# Altium PCB MTG_B_MAIN.PcbDoc (part 2 of 2)
Units mm, origin at the board's own origin, x right, y up, seen from the top; angles counter-clockwise.
Board outline 99.45 x 60.57 mm, 4 copper layers (Top Layer, Layer 1, Layer 2, Bottom Layer), stack 1.544 mm thick; 115 components, 96 nets, 460 pads, 131 vias.
Unrouted connection lines stored in the file: 2.
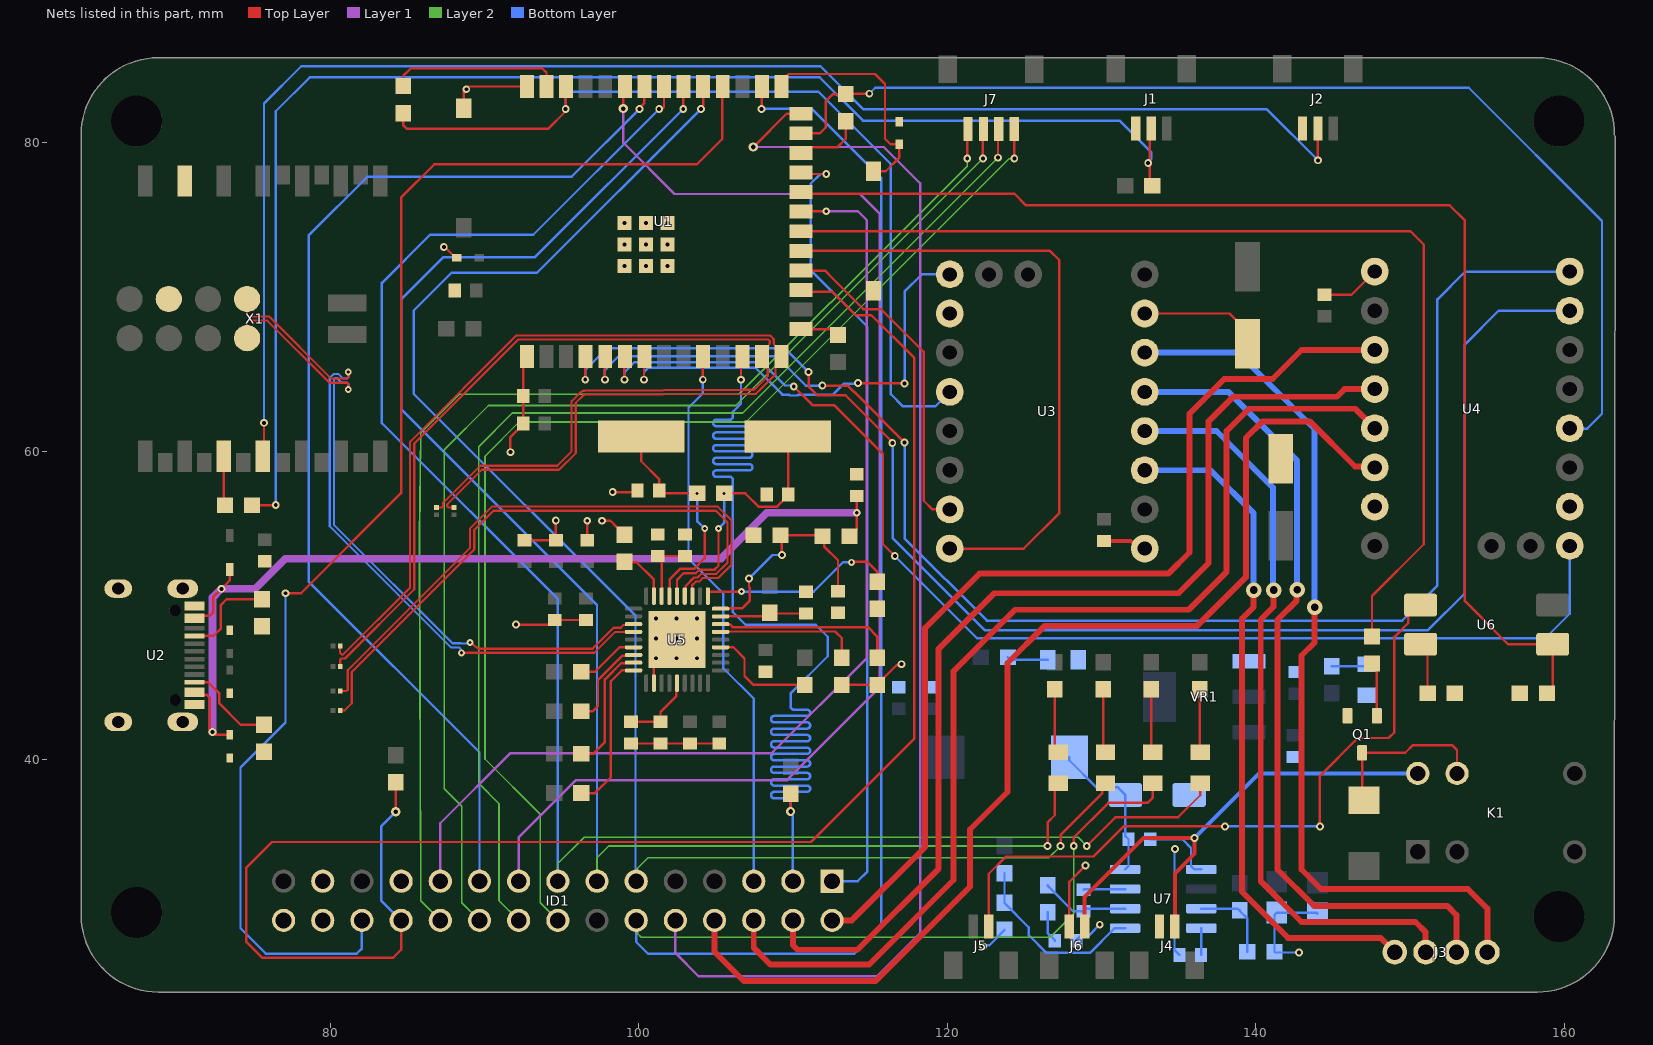
[diagram p4: the nets of this part, all layers, seen from the top]

## Via types
v1: diameter 0.508, hole 0.254, Top Layer to Bottom Layer, 103 vias
v2: diameter 0.45, hole 0.2, Top Layer to Bottom Layer, 20 vias
v3: diameter 1, hole 0.5, Top Layer to Bottom Layer, 4 vias
v4: diameter 0.6, hole 0.3, Top Layer to Bottom Layer, 4 vias

## Nets (pads, with @x,y where several pads share a name; then routed paths per layer and width w, separated by ;. In a path a pad name is that pad's centre, name@x,y a point inside that pad or via, vN(x,y) a via of type N, cw(c..) or ccw(c..) an arc to the next point about the centre after c; other vN are vias at no path point) (continued)
ESP_D_N: R37.2 R41.2 U1.13 | length 72.1
  Top Layer w0.139: R37.2@80.645,46.036 80.636,46.043 80.636,46.49 80.718,46.572 80.944,46.572 85.43,51.058 85.43,60.507 92.163,67.24 108.394,67.24 108.476,67.158 108.476,67.043 108.47,67.037 108.47,66.949 107.974,66.453 U1.13@107.974,66.153 108.354,65.773 108.354,64.876 107.606,64.127 ; R41.2@86.868,56.363 87.225,56.363 87.306,56.445 87.306,56.67 89.703,59.067 94.708,59.067 95.635,59.994 95.635,63.25 96.196,63.811 cw(c96.385,63.623) 96.199,63.814 cw(c96.482,63.523) 96.48,63.929 106.692,63.99 107.468,63.99 107.604,64.126
ESP_D_P: R36.2 R40.2 U1.14 | length 72.7
  Top Layer w0.139: R36.2@80.62,47.371 80.62,46.936 80.718,46.838 80.834,46.838 85.164,51.169 85.164,60.617 92.053,67.506 108.505,67.506 108.742,67.268 108.742,67.043 108.748,67.037 108.748,66.949 109.244,66.453 U1.14@109.244,66.153 109.244,65.853 108.864,65.473 108.864,65.008 107.794,63.938 ; R40.2@88.011,56.363 87.654,56.363 87.573,56.445 87.573,56.56 89.814,58.801 94.818,58.801 95.901,59.884 95.901,63.139 96.385,63.623 cw(c96.482,63.523) 96.481,63.663 106.693,63.724 107.579,63.724 107.787,63.932 ; 107.788,63.933 ccw(c107.606,64.127) 107.793,63.937
EXTRA: J2.2 X1.4 | length 96.8
  Top Layer w0.156: X1.4@75.627,59.69 75.692,59.755 v1(75.692,61.849) ; v1(144.018,78.867) J2.2@144.018,80.924
  Bottom Layer w0.156: v1(75.692,61.849) 75.692,82.55 78.105,84.963 111.76,84.963 114.554,82.169 140.716,82.169 v1(144.018,78.867)
EXTRA_1: ID1.17 U1.35 | length 83.2
  Top Layer w0.156: v4(98.984,82.22) 98.984,83.553 U1.35@99.084,83.653
  Layer 1 w0.156: ID1.17@92.202,32.131 92.202,34.976 95.91,38.684 109.601,38.684 115.595,44.679 115.595,75.413 114.325,76.683 102.311,76.683 98.984,80.01 v4(98.984,82.22)
EXTRA_2: ID1.10 U1.26 | length 84.1
  Top Layer w0.156: v4(107.417,79.731) 109.574,81.888 U1.26@110.494,81.888
  Layer 1 w0.156: ID1.10@102.362,29.591 102.362,27.483 103.881,25.964 115.423,25.964 118.237,28.778 118.237,77.368 115.875,79.731 v4(107.417,79.731)
GND: C1.1 C2.1 C3.1 C4.1 C5.2 C6.2 C7.2 C8.2 C9.1 C10.1 C11.1 C12.1 C13.1 C14.1 C15.1 C16.1 C17.1 C18.1 C19.1 C20.2 C21.1 C22.1 C23.2 C24.1 C25.1 C27.1 C28.1 C29.1 C30.1 C31.1 C32.1 C33.1 C34.1 C35.1 D2.2 D3.2 D4.2 D5.2 D6.2 D12.A D13.1 D14.1 ID1.23 ID1.27 ID1.28 ID1.30 J1.3 J2.3 J4.2 J6.2 Q1.2 R5.1 R6.1 R10.2 R12.2 R13.2 R14.2 R18.2 R22.1 R23.2 R30.2 R31.2 S3.1 S4.1 U1.1 U1.40 U1.41_1 U1.41_2 U1.41_3 U1.41_4 U1.41_5 U1.41_6 U1.41_7 U1.41_8 U1.41_9 U2.0 U2.1 U2.2 U2.3 U2.A1 U2.A12 U2.B1 U2.B12 U3.1 U3.7 U3.10 U4.1 U4.7 U4.10 U5.11 U5.37 U7.7 VR1.1 X1.13 X1.27 | length 78.1
  Top Layer w0.156: U2.A12@71.195,43.429 U2.B1@71.195,43.729 ; U2.B12@71.195,49.829 U2.A1@71.195,50.129 ; v1(87.351,73.254) 87.414,73.254 88.125,72.542 D5.2@88.189,72.542 ; S4.1@88.631,82.247 88.631,83.297 88.987,83.653 U1.40@92.734,83.653 ; v1(91.669,59.944) 91.669,60.92 92.496,61.747 C2.1@92.496,61.797 C3.1@92.496,63.575 92.496,65.915 U1.1@92.734,66.153 ; v1(92.024,48.768) 94.246,48.768 C18.1@94.54,49.062 C19.1@96.572,49.062 ; C15.1@92.583,54.232 94.603,54.232 94.609,54.238 v1(94.609,55.506) ; C16.1@96.647,54.232 v1(96.647,55.499) ; v1(97.612,55.499) 98.146,55.499 98.609,55.037 98.632,55.037 99.06,54.609 R18.2@99.06,54.585 ; v1(98.298,57.353) 99.803,57.353 C20.2@99.906,57.456 ; C25.1@99.493,41.061 C24.1@101.398,41.061 C9.1@103.303,41.061 C10.1@105.208,41.061 ; U5.11@100.969,44.976 100.969,46.435 v1(101.117,46.584) ; R13.2@113.157,44.856 R14.2@115.443,44.856 ; R14.2@115.443,44.879 116.696,46.132 116.963,46.132 v1(117.03,46.199) ; J6.2@127.897,29.207 127.897,32.088 v1(128.956,33.147) ; C8.2@130.148,54.186 C8.2@130.47,53.864 ; U3.7@132.791,68.936 138.279,68.936 139.446,67.769 C7.2@139.446,66.969 ; C6.2@144.451,70.147 146.194,70.147 U4.1@147.701,71.653
  Top Layer w0.254: C8.2@130.148,54.186 131.882,54.186 132.373,53.696 U3.1@132.791,53.696
  Bottom Layer w0.156: v1(122.301,27.915) 122.368,27.982 122.723,27.982 123.698,28.957 R30.2@123.698,28.981 ; C33.1@128.357,28.269 128.357,28.319 128.679,28.641 129.199,28.641 v1(129.871,29.313) ; C32.1@128.83,31.583 128.87,31.623 U7.7@131.515,31.623 ; v1(134.747,34.214) 134.719,34.186 134.719,27.679 C31.1@135.041,27.357 ; v1(142.799,27.508) 141.25,27.508 R31.2@141.199,27.559 141.199,29.947 C30.1@141.351,30.099 143.914,30.099 C29.1@143.982,30.032
  other v1: 102.438,46.584 103.759,46.584 101.117,47.866 102.438,47.866 103.759,47.866 101.117,49.149 102.438,49.149 103.759,49.149 99.054,72.003 100.454,72.003 101.854,72.003 99.054,73.403 100.454,73.403 101.854,73.403 99.054,74.803 100.454,74.803 101.854,74.803 88.809,83.475
HUB_D_N: R39.2 U5.30 | length 38.8
  Top Layer w0.139: R39.2@80.645,44.46 81.034,44.46 81.12,44.545 81.12,45.809 89.056,53.745 89.056,55.006 90.463,56.413 105.11,56.413 105.996,55.528 105.996,52.653 105.131,51.788 104.141,51.788 103.903,51.55 103.68,51.55 103.437,51.307 103.437,50.648 U5.30@103.469,50.616
HUB_D_P: R38.2 U5.31 | length 39.3
  Top Layer w0.139: R38.2@80.645,43.19 80.66,43.205 80.924,43.205 81.386,43.667 81.386,45.699 89.322,53.635 89.322,54.896 90.574,56.147 105,56.147 105.73,55.417 105.73,52.763 105.021,52.054 104.031,52.054 103.792,51.816 103.57,51.816 103.015,51.262 103.015,50.662 U5.31@102.969,50.616
L_1A: J3.3 U3.4 | length 49
  Top Layer w0.381: v3(141.148,51.003) 141.135,50.99 141.135,49.923 140.31,49.098 140.31,32.131 142.951,29.489 150.343,29.489 151.002,28.83 J3.3@151.002,27.537
  Bottom Layer w0.381: U3.4@132.791,61.316 137.439,61.316 141.097,57.658 v3@141.097,51.003
L_1B: J3.4 U3.3 | length 44.6
  Top Layer w0.381: v3(139.852,51.004) 139.852,49.911 139.092,49.15 139.092,31.444 142.088,28.448 148.09,28.448 J3.4@149.002,27.537
  Bottom Layer w0.381: U3.3@132.791,58.776 137.058,58.776 139.852,55.982 v3(139.852,51.004)
L_2A: J3.2 U3.5 | length 54
  Top Layer w0.381: v3(142.672,51.029) 142.638,50.995 142.638,50.309 141.402,49.073 141.402,32.893 143.764,30.531 152.4,30.531 153.002,29.929 J3.2@153.002,27.537
  Bottom Layer w0.381: U3.5@132.791,63.856 138.201,63.856 142.672,59.385 v3(142.672,51.029)
L_2B: J3.1 U3.6 | length 57.9
  Top Layer w0.381: v3@143.789,49.886 143.789,47.6 142.951,46.761 142.951,32.893 144.215,31.63 153.74,31.63 155.002,30.368 J3.1@155.002,27.537
  Bottom Layer w0.381: U3.6@132.791,66.396 138.836,66.396 143.789,61.443 143.789,51.003 143.802,50.99 143.802,49.898 v3(143.815,49.886)
LED+: ID1.20 J7.3 | length 76.1
  Top Layer w0.156: v1(122.301,78.994) 122.301,80.867 J7.3@122.333,80.899
  Layer 2 w0.108: ID1.20@89.662,29.591 88.519,30.734 88.519,36.982 87.376,38.125 87.376,60.096 90.246,62.967 106.274,62.967 v1(122.301,78.994)
LED-: ID1.22 J7.4 | length 77.2
  Top Layer w0.156: v1(121.285,78.994) 121.285,80.851 J7.4@121.333,80.899
  Layer 2 w0.108: ID1.22@87.122,29.591 85.884,30.829 85.852,30.861 85.777,54.324 cw(c86.31,54.326) 85.777,54.332 85.852,61.189 85.884,61.22 88.367,63.703 106.477,63.703 112.401,69.628 112.427,69.628 121.285,78.486 v1(121.285,78.994)
LED_RING: ID1.5 U1.10 | length 36.2
  Top Layer w0.156: v1(104.14,64.643) 104.14,66.129 U1.10@104.164,66.153
  Bottom Layer w0.156: v1(104.14,64.643) 104.14,63.754 103.214,62.828 103.214,53.037 105.469,50.782 105.469,45.94 107.442,43.967 ID1.5@107.442,32.131
LED_STRIP: ID1.26 U1.30 | length 88.6
  Top Layer w0.156: v1(77.089,50.8) 78.089,50.8 84.582,57.293 84.582,76.454 86.741,78.613 103.759,78.613 105.4,80.254 105.4,83.619 U1.30@105.434,83.653
  Bottom Layer w0.156: v1(77.089,50.8) 77.089,42.418 74.168,39.497 74.168,29.083 75.819,27.432 81.696,27.432 82.042,27.778 ID1.26@82.042,29.591
LIFT_DIR: U1.19 U3.16 | length 41.5
  Top Layer w0.156: U1.19@110.494,72.998 126.646,72.998 127.254,72.39 127.254,56.007 124.943,53.696 U3.16@120.151,53.696
LIFT_EN: U1.7 U3.9 | length 29.6
  Top Layer w0.156: v1@100.33,64.467 100.33,66.129 U1.7@100.354,66.153 ; v1(114.192,64.422) 114.209,64.406 117.204,64.406 v1(117.221,64.389)
  Bottom Layer w0.156: v1(100.33,64.643) 100.33,65.151 100.584,65.405 107.569,65.405 109.298,63.676 109.739,63.676 109.795,63.62 110.28,63.62 110.336,63.676 112.571,63.676 113.284,64.389 114.159,64.389 v1(114.192,64.422) ; v1(117.221,64.389) 117.221,70.358 118.339,71.476 U3.9@120.151,71.476
LIFT_STEP: U1.18 U3.15 | length 21.7
  Top Layer w0.156: U1.18@110.494,71.728 110.508,71.714 112.055,71.714 112.6,71.169 114.554,69.215 115.697,69.215 118.465,66.447 118.465,56.795 119.024,56.236 U3.15@120.151,56.236
LIMIT_1: D8.1 ID1.11 U1.31 | length 102.7
  Top Layer w0.156: v1(104.013,82.202) 104.013,82.298 104.164,82.449 U1.31@104.164,83.653 ; v1(127.339,34.417) 127.339,35.137 130.048,37.846 130.048,38.291 D8.1@130.246,38.489
  Layer 2 w0.108: ID1.11@99.822,32.131 99.909,32.218 99.909,32.98 100.584,33.655 126.577,33.655 v1(127.339,34.417)
  Bottom Layer w0.156: ID1.11@99.822,32.131 99.774,32.179 99.774,49.35 85.395,63.729 85.395,69.113 87.859,71.577 93.388,71.577 v1(104.013,82.202)
LIMIT_2: D9.1 ID1.13 U1.32 | length 103.2
  Top Layer w0.156: v1(102.87,82.202) 102.87,83.629 U1.32@102.894,83.653 ; v1(126.492,34.417) 126.492,35.941 126.958,36.407 126.958,38.27 D9.1@127.176,38.489
  Layer 2 w0.108: ID1.13@97.282,32.131 97.282,33.655 98.044,34.417 v1(126.492,34.417)
  Bottom Layer w0.156: ID1.13@97.282,32.131 97.282,50.038 84.607,62.713 84.607,69.875 87.325,72.593 93.261,72.593 v1(102.87,82.202)
LIMIT_3: D10.1 ID1.15 U1.33 | length 113.8
  Top Layer w0.156: v1@101.313,82.016 101.624,82.328 U1.33@101.624,83.653 ; v1(129.032,34.417) 130.891,36.276 134.955,36.276 136.385,37.706 D10.1@136.385,38.489
  Layer 2 w0.108: ID1.15@94.742,32.131 94.742,33.274 96.447,34.979 128.47,34.979 v1(129.032,34.417)
  Bottom Layer w0.156: ID1.15@94.742,32.131 94.742,50.419 83.337,61.824 83.337,70.917 86.462,74.041 93.151,74.041 v1(101.313,82.202)
LIMIT_4: D11.1 ID1.12 U1.28 | length 119.9
  Top Layer w0.156: v1(107.95,82.202) 107.95,83.629 U1.28@107.974,83.653 ; v1(128.185,34.417) 128.185,34.967 130.429,37.211 132.969,37.211 133.315,37.557 D11.1@133.315,38.489
  Layer 2 w0.108: ID1.12@99.822,29.591 99.909,29.504 99.909,28.742 100.149,28.502 126.673,28.502 128.185,30.014 v1(128.185,34.417)
  Bottom Layer w0.156: ID1.12@99.822,29.591 99.822,28.194 100.584,27.432 113.954,27.432 115.697,29.175 115.697,77.724 111.219,82.202 v1(107.95,82.202)
N_1A: ID1.4 U4.4 | length 68.2
  Top Layer w0.381: ID1.4@109.982,29.591 109.982,27.984 110.28,27.686 114.173,27.686 119.431,32.944 119.431,47.193 123.038,50.8 134.976,50.8 136.931,52.756 136.931,61.951 138.519,63.538 145.25,63.538 145.745,64.033 U4.4@147.701,64.033
N_1B: ID1.2 U4.3 | length 64.1
  Top Layer w0.381: ID1.2@112.522,29.591 113.792,29.591 118.542,34.341 118.542,48.539 122.072,52.07 134.315,52.07 135.687,53.442 135.687,62.433 137.947,64.694 141.072,64.694 142.951,66.573 U4.3@147.701,66.573
N_2A: ID1.6 U4.5 | length 71.2
  Top Layer w0.381: ID1.6@107.442,29.591 107.442,27.813 108.534,26.721 114.91,26.721 120.396,32.207 120.396,45.745 124.384,49.733 135.636,49.733 138.1,52.197 138.1,61.316 139.548,62.763 146.431,62.763 U4.5@147.701,61.493
N_2B: ID1.8 U4.6 | length 74.2
  Top Layer w0.381: ID1.8@104.902,29.591 104.902,27.559 106.807,25.654 115.341,25.654 121.463,31.775 121.463,35.484 123.898,37.919 123.898,46.275 126.306,48.683 136.196,48.683 139.344,51.832 139.344,60.858 140.411,61.925 143.51,61.925 146.424,59.011 147.643,59.011 U4.6@147.701,58.953
NetC11_2: C11.2 R8.2 U5.26 | length 5.7
  Top Layer w0.156: U5.26@105.289,49.296 108.224,49.296 R8.2@108.47,49.542 108.525,49.487 C11.2@110.819,49.487
NetC14_2: C14.2 R9.2 R10.1 U5.27 | length 14.4
  Top Layer w0.156: U5.27@105.289,49.796 105.332,49.839 106.713,49.839 107.196,50.322 107.196,51.132 107.137,51.191 v1(107.137,51.765) ; v1(109.271,53.289) 109.271,54.458 R10.1@109.182,54.547 111.835,54.547 112.003,54.379 112.003,53.834 112.903,52.934 C14.2@112.903,50.927
  Bottom Layer w0.156: v1(107.137,51.765) 108.65,53.278 109.26,53.278 v1(109.271,53.289)
NetC20_1: C20.1 R15.1 U5.33 Y1.2 | length 14.9
  Top Layer w0.156: Y1.2@100.152,60.96 100.152,59.36 101.306,58.206 C20.1@101.306,57.456 101.485,57.277 v2(103.771,57.277) ; U5.33@101.969,50.616 102.007,50.654 102.007,51.715 102.666,52.374 103.561,52.374 104.267,53.08 v2(104.267,54.991)
  Bottom Layer w0.156: v2(103.771,57.277) 103.771,55.487 v2(104.267,54.991)
NetC21_2: C21.2 C22.2 U5.34 | length 4.8
  Top Layer w0.156: U5.34@101.469,50.616 C22.2@101.469,52.832 ; C21.2@102.997,53.213 C22.2@101.469,53.213 ; C22.2@101.469,53.213 C22.2@101.219,53.213 101.169,53.213 101.469,53.513 C22.2@101.469,53.213
NetC23_1: C23.1 R15.2 U5.32 Y1.1 | length 17.6
  Top Layer w0.156: U5.32@102.469,50.616 102.469,51.669 102.891,52.091 103.678,52.091 103.917,52.329 104.907,52.329 105.156,52.578 v2(105.156,54.991) ; v2(105.525,57.277) 106.893,57.277 107.751,56.42 108.956,56.42 109.688,57.152 C23.1@109.688,57.202 109.688,60.924 Y1.1@109.652,60.96
  Bottom Layer w0.156: v2(105.156,54.991) 105.525,55.36 v2(105.525,57.277)
NetC24_2: C24.2 C25.2 U5.14 | length 4.9
  Top Layer w0.156: C25.2@99.493,42.461 C24.2@101.398,42.461 101.398,43.105 101.854,43.561 102.431,44.138 102.431,44.938 U5.14@102.469,44.976
NetC26_1: C26.1 D12.C l1.1 U7.8 | length 9.8
  Bottom Layer w0.156: l1.1@127.898,40.17 127.898,39.97 129.638,38.23 131.028,38.23 D12.C@131.539,37.719 131.539,35.05 C26.1@131.739,34.85 131.739,33.115 U7.8@131.515,32.893 U7.8@131.515,32.893
NetC26_2: C26.2 U7.1 | length 4.8
  Bottom Layer w0.156: C26.2@133.139,34.85 135.228,34.85 135.791,34.287 135.791,33.115 136.013,32.893 U7.1@136.455,32.893
NetC31_2: C31.2 U7.4 | length 1.7
  Bottom Layer w0.156: C31.2@136.441,27.357 136.455,27.371 U7.4@136.455,29.083
NetC32_2: C32.2 R32.1 U7.6 | length 6.5
  Bottom Layer w0.156: R32.1@126.492,31.865 126.492,31.841 128.15,30.183 C32.2@128.83,30.183 129,30.353 U7.6@131.515,30.353 U7.6@130.83,30.353
NetC33_2: C33.2 R32.2 | length 2
  Bottom Layer w0.156: R32.2@126.492,30.111 126.492,28.784 126.957,28.319 C33.2@126.957,28.269
NetD7_2: D7.2 K1.9 Q1.3 | length 11.1
  Top Layer w0.156: D7.2@147.012,37.377 146.887,37.502 Q1.3@146.887,40.456 149.676,40.456 150.176,40.956 152.719,40.956 153.035,40.64 K1.9@153.035,39.116
NetD8_2: D8.2 R24.2 | length 4.2
  Top Layer w0.156: R24.2@130.09,44.577 130.09,40.644 D8.2@130.246,40.488
NetD9_2: D9.2 R25.2 | length 4.2
  Top Layer w0.156: R25.2@126.958,44.577 126.958,40.707 D9.2@127.176,40.488
NetD10_2: D10.2 R26.2 | length 4.1
  Top Layer w0.156: R26.2@136.356,44.577 136.356,40.517 D10.2@136.385,40.488
NetD11_2: D11.2 R27.2 | length 4.1
  Top Layer w0.156: R27.2@133.223,44.577 133.223,40.581 D11.2@133.315,40.488
NetD13_2: D13.2 R33.2 | length 2.6
  Bottom Layer w0.156: R33.2@123.92,46.646 124.084,46.482 D13.2@126.492,46.482
NetD14_2: D14.2 R34.2 | length 2.3
  Bottom Layer w0.156: R34.2@144.907,46.076 147.074,46.076 D14.2@147.193,46.196
NetJ1_2: J1.2 R7.1 R35.1 | length 91.3
  Top Layer w0.156: R7.1@74.918,56.515 v1(76.454,56.515) ; v1(133.013,78.682) 133.072,78.682 v1@133.102,78.651 ; J1.2@133.214,80.924 133.102,80.812 133.102,78.867 133.08,78.844 133.08,78.674 v1@133.102,78.651 ; R35.1@133.289,77.458 133.102,77.644 v1@133.102,78.651
  Bottom Layer w0.156: v1(76.454,56.515) 76.454,82.042 78.664,84.252 111.709,84.252 114.52,81.441 131.157,81.441 133.217,79.381 133.217,78.982 133.013,78.777 v1(133.013,78.682)
NetJ4_1: J4.1 J6.1 K1.10 | length 33.1
  Top Layer w0.254: J6.1@128.897,29.207 128.897,31.107 132.715,34.925 v1@136.017,34.925 ; J4.1@134.739,29.207 134.739,32.631 136.017,33.909 v1@136.017,34.925 ; v1(136.025,34.933) v1@136.017,34.925
  Bottom Layer w0.254: v1(136.025,34.933) 140.208,39.116 K1.10@150.495,39.116
NetJ5_1: J5.1 U6.1 | length 44.5
  Top Layer w0.156: J5.1@122.674,29.207 122.674,32.619 123.788,33.733 129.466,33.733 131.42,35.687 v1(137.998,35.687) ; v1(144.145,35.687) 144.145,38.961 146.598,41.414 148.602,41.414 148.971,41.783 148.971,47.969 149.861,48.859 149.861,49.38 150.514,50.034 U6.1@150.673,50.034
  Bottom Layer w0.156: v1(137.998,35.687) v1(144.145,35.687)
NetQ1_1: Q1.1 R21.2 | length 3.5
  Top Layer w0.156: R21.2@147.522,46.24 147.837,45.925 Q1.1@147.837,42.856
NetR1_2: R1.2 U1.39 | length 11.2
  Top Layer w0.156: R1.2@84.709,83.681 84.734,83.706 84.734,84.353 85.217,84.836 93.726,84.836 94.004,84.558 U1.39@94.004,83.653
NetR2_2: R2.2 U1.15 | length 2.6
  Top Layer w0.156: U1.15@110.494,67.918 112.524,67.918 R2.2@112.903,67.539
NetR3_1: R3.1 U1.24 | length 4.4
  Top Layer w0.156: U1.24@110.494,79.348 110.866,79.72 112.867,79.72 113.411,80.264 R3.1@113.411,81.407
NetR5_2: R5.2 U2.B5 | length 6
  Top Layer w0.156: U2.B5@71.195,45.029 72.065,45.029 72.799,44.295 72.799,43.66 74.18,42.279 R5.2@75.692,42.279
NetR6_2: R6.2 U2.A5 | length 6.2
  Top Layer w0.156: U2.A5@71.195,48.029 71.213,48.047 72.431,48.047 72.898,48.514 72.898,50.038 73.267,50.407 R6.2@75.565,50.407
NetR7_2: R7.2 X1.3 | length 3.2
  Top Layer w0.156: X1.3@73.087,59.69 73.087,56.592 R7.2@73.164,56.515
NetR11_2: R11.2 U5.22 | length 7.1
  Top Layer w0.156: U5.22@105.289,47.296 106.12,47.296 106.843,46.573 106.843,45.43 107.417,44.856 R11.2@110.744,44.856
NetR12_1: R12.1 U5.28 | length 13
  Top Layer w0.156: U5.28@104.469,50.616 104.469,50.851 104.52,50.902 v2(106.639,50.902) ; v2(113.792,52.807) 113.817,52.832 114.808,52.832 115.43,52.21 115.43,51.55 R12.1@115.443,51.537
  Bottom Layer w0.156: v2(106.639,50.902) 111.328,50.902 113.233,52.807 v2(113.792,52.807)
NetR13_1: R13.1 U5.24 | length 8.8
  Top Layer w0.156: U5.24@105.289,48.296 105.314,48.321 112.715,48.321 113.157,47.879 R13.1@113.157,47.105
NetR14_1: R14.1 U5.25 | length 11.4
  Top Layer w0.156: U5.25@105.289,48.796 105.327,48.758 105.938,48.758 106.092,48.604 114.845,48.604 115.443,48.006 R14.1@115.443,47.105
NetR16_2: R16.2 U5.6 | length 4
  Top Layer w0.156: R16.2@96.254,45.72 97.165,45.72 98.741,47.296 U5.6@99.649,47.296
NetR17_2: R17.2 U5.7 | length 5.9
  Top Layer w0.156: R17.2@96.254,43.138 96.986,43.138 97.343,43.495 97.343,45.166 98.935,46.758 99.163,46.758 99.201,46.796 U5.7@99.649,46.796
NetR18_1: R18.1 U5.35 | length 3.5
  Top Layer w0.156: R18.1@99.06,52.832 99.083,52.809 99.845,52.809 100.969,51.685 U5.35@100.969,50.616
NetR19_2: R19.2 U5.8 | length 8.2
  Top Layer w0.156: R19.2@96.254,40.386 97.028,40.386 97.79,41.148 97.79,45.212 98.836,46.258 99.611,46.258 U5.8@99.649,46.296
NetR20_2: R20.2 U5.9 | length 10.3
  Top Layer w0.156: R20.2@96.254,37.846 97.155,37.846 98.171,38.862 98.171,45.085 98.882,45.796 U5.9@99.649,45.796
NetR22_2: R22.2 U6.2 | length 3.4
  Top Layer w0.156: U6.2@150.673,47.494 151.119,47.047 151.119,44.346 R22.2@151.142,44.323
NetR28_2: R28.2 R31.1 U7.3 | length 5.4
  Bottom Layer w0.156: U7.3@136.455,30.353 138.823,30.353 R28.2@138.938,30.238 138.938,30.215 139.446,29.707 R31.1@139.446,27.559
NetR29_2: R29.2 R30.1 U7.5 | length 12
  Bottom Layer w0.156: R30.1@123.698,30.711 125.273,29.136 125.273,28.634 126.42,27.487 129.234,27.487 130.83,29.083 U7.5@131.515,29.083 ; R30.1@123.698,30.734 R29.2@123.698,32.651
NIMA_DIR: U1.5 U4.16 | length 96.2
  Top Layer w0.156: v1@97.79,64.516 97.79,66.129 U1.5@97.814,66.153 ; v1(111.887,64.262) 111.888,64.263 113.537,64.263 113.606,64.194 113.606,64.18 113.95,63.836 113.964,63.836 v1(117.221,60.579)
  Bottom Layer w0.156: v1(97.79,64.643) 97.79,65.278 98.679,66.167 108.906,66.167 110.811,64.262 v1(111.887,64.262) ; v1(117.221,60.579) 117.221,54.356 122.555,49.022 149.479,49.022 151.765,51.308 151.765,69.85 153.568,71.653 U4.16@160.341,71.653
NIMA_EN: U1.6 U4.9 | length 79.6
  Top Layer w0.156: v1@99.06,64.516 99.06,66.129 U1.6@99.084,66.153 ; v1(110.037,64.207) 111.252,62.992 112.649,62.992 115.824,59.817 115.824,53.975 v1(116.586,53.213)
  Bottom Layer w0.156: v1(99.06,64.643) 99.06,65.127 99.719,65.786 107.95,65.786 109.471,64.265 109.979,64.265 v1(110.037,64.207) ; v1(116.586,53.213) 121.92,47.879 158.75,47.879 160.341,49.47 U4.9@160.341,53.873
NIMA_STEP: U1.4 U4.15 | length 96.4
  Top Layer w0.156: v1(96.52,64.643) 96.52,66.129 U1.4@96.544,66.153 ; v1(110.998,65.151) 110.998,64.195 111.566,63.627 113.411,63.627 116.426,60.612 v1(116.426,60.546)
  Bottom Layer w0.156: v1(96.52,64.643) 96.52,65.278 97.917,66.675 109.474,66.675 v1(110.998,65.151) ; v1(116.426,60.546) 116.459,60.512 116.459,54.356 122.428,48.387 151.13,48.387 153.543,50.8 153.543,66.929 155.727,69.113 U4.15@160.341,69.113
PRESSURE_SWITCH: R23.1 U1.22 U6.3 | length 78.7
  Top Layer w0.156: U1.22@110.494,76.808 110.594,76.708 124.333,76.708 125.095,75.946 152.562,75.946 153.543,74.965 153.543,50.292 156.341,47.494 U6.3@159.232,47.494 159.232,44.691 R23.1@158.865,44.323
RELAY: R21.1 U1.20 | length 67.5
  Top Layer w0.156: U1.20@110.494,74.268 150.014,74.268 150.876,73.406 150.876,53.975 147.522,50.621 R21.1@147.522,47.994
RESET: D6.1 S3.2 U1.27 | length 15
  Top Layer w0.156: U1.27@109.244,83.653 109.616,84.025 109.616,84.368 109.707,84.46 115.311,84.46 115.951,83.82 115.951,80.264 116.307,79.908 D6.1@116.865,79.908 116.865,79.019 116.003,78.157 S3.2@115.204,78.157
RX_L: R1.1 U1.38 U3.12 | length 56.9
  Top Layer w0.156: R1.1@84.709,81.927 84.709,81.153 84.963,80.899 94.107,80.899 95.25,82.042 95.25,83.329 95.274,83.353 U1.38@95.274,83.653
  Bottom Layer w0.156: v1(95.25,82.202) 95.25,82.931 95.631,83.312 111.633,83.312 116.332,78.613 116.332,63.703 117.119,62.916 119.211,62.916 U3.12@120.151,63.856
RX_N: R3.2 U1.25 U4.12 | length 72.8
  Top Layer w0.156: U1.25@110.494,80.618 111.733,80.618 112.123,81.008 112.123,82.707 112.577,83.16 R3.2@113.411,83.16 113.436,83.185 v1(114.935,83.185)
  Bottom Layer w0.156: v1(114.935,83.185) 115.316,83.566 153.797,83.566 162.433,74.93 162.433,62.433 161.468,61.468 U4.12@160.239,61.468
SCL: ID1.24 R43.1 U1.17 | length 107.9
  Top Layer w0.156: v4(84.226,36.627) R43.1@84.226,38.544 ; ID1.24@84.582,29.591 84.582,27.686 84.074,27.178 75.565,27.178 74.549,28.194 74.549,33.02 76.2,34.671 111.15,34.671 117.856,41.377 117.856,66.04 115.062,68.834 114.046,68.834 112.522,70.358 110.594,70.358 U1.17@110.494,70.458
  Bottom Layer w0.156: v4(84.226,36.627) 83.287,35.687 83.287,30.886 ID1.24@84.582,29.591
SDA: ID1.3 R42.1 U1.12 | length 95.7
  Top Layer w0.156: v1(106.617,64.638) 106.617,65.481 U1.12@106.704,66.153 ; v4(109.83,36.652) R42.1@109.83,37.807
  Bottom Layer w0.156: v1(106.617,64.638) 106.617,63.093 106.082,62.557 106.082,62.25 cw(c105.877,62.25) 105.877,62.045 105.017,62.045 ccw(c105.017,61.84) 105.017,61.635 107.147,61.635 cw(c107.147,61.429) 107.147,61.224 105.017,61.224 ccw(c105.017,61.019) 105.017,60.814 107.147,60.814 cw(c107.147,60.609) 107.147,60.404 105.017,60.404 ccw(c105.017,60.198) 105.017,59.993 107.147,59.993 cw(c107.147,59.788) 107.147,59.583 105.017,59.583 ccw(c105.017,59.378) 105.017,59.173 107.147,59.173 cw(c107.147,58.967) 107.147,58.762 105.017,58.762 ccw(c105.017,58.557) 105.017,58.352 105.877,58.352 cw(c105.877,58.147) 106.082,58.147 106.082,58.068 106.082,49.595 106.918,48.758 111.465,48.758 112.243,47.981 112.243,46.711 109.83,44.298 109.83,44.135 109.83,43.461 ccw(c110.035,43.461) 110.035,43.256 110.894,43.256 cw(c110.894,43.051) 110.894,42.846 108.765,42.846 ccw(c108.765,42.641) 108.765,42.435 110.894,42.435 cw(c110.894,42.23) 110.894,42.025 108.765,42.025 ccw(c108.765,41.82) 108.765,41.615 110.894,41.615 cw(c110.894,41.41) 110.894,41.204 108.765,41.204 ccw(c108.765,40.999) 108.765,40.794 110.894,40.794 cw(c110.894,40.589) 110.894,40.384 108.765,40.384 ccw(c108.765,40.179) 108.765,39.973 110.894,39.973 cw(c110.894,39.768) 110.894,39.563 108.765,39.563 ccw(c108.765,39.358) 108.765,39.153 110.894,39.153 cw(c110.894,38.947) 110.894,38.742 108.765,38.742 ccw(c108.765,38.537) 108.765,38.332 110.894,38.332 cw(c110.894,38.127) 110.894,37.922 108.765,37.922 ccw(c108.765,37.716) 108.765,37.511 109.624,37.511 cw(c109.624,37.306) 109.83,37.306 109.83,37.228 109.83,36.532 109.982,36.38 ID1.3@109.982,32.131
SERVO: ID1.1 U1.23 | length 51.6
  Top Layer w0.156: U1.23@110.494,78.078 110.594,77.978 v1(112.141,77.978)
  Bottom Layer w0.156: v1(112.141,77.978) 111.76,77.978 111.125,77.343 111.125,71.755 114.808,68.072 114.808,32.766 114.173,32.131 ID1.1@112.522,32.131
SW1: ID1.16 J7.1 | length 76.3
  Top Layer w0.156: v1(124.333,78.994) J7.1@124.333,80.899
  Layer 2 w0.108: ID1.16@94.742,29.591 93.599,30.734 93.599,36.473 90.018,40.054 90.018,59.69 92.227,61.9 106.936,61.9 123.995,78.959 124.298,78.959 v1(124.333,78.994)
SW2: ID1.18 J7.2 | length 75.1
  Top Layer w0.156: v1(123.276,79.035) 123.276,80.842 J7.2@123.333,80.899
  Layer 2 w0.108: ID1.18@92.202,29.591 90.932,30.861 90.932,37.16 89.611,38.481 89.611,60.3 91.796,62.484 106.738,62.484 v1@123.282,79.029
U_A: ID1.21 U1.21 | length 68.9
  Top Layer w0.156: U1.21@110.494,75.538 110.521,75.565 v1@112.268,75.565
  Layer 1 w0.156: ID1.21@87.122,32.131 87.122,35.89 91.669,40.437 108.61,40.437 114.779,46.605 114.779,74.985 114.198,75.565 v1(112.141,75.565)
U_B: ID1.19 U1.34 | length 72.9
  Top Layer w0.156: v1(100.043,82.202) 100.043,82.27 100.354,82.582 U1.34@100.354,83.653
  Bottom Layer w0.156: ID1.19@89.662,32.131 89.662,40.488 78.588,51.562 78.588,73.99 82.393,77.796 95.636,77.796 v1(100.043,82.202)
VBUS: C13.2 D1.2 D2.1 R9.1 U2.A4 U2.A9 U2.B4 U2.B9 | length 65.2
  Top Layer w0.156: U2.B4@71.195,44.529 U2.A9@71.195,44.229 71.213,44.211 71.983,44.211 72.178,44.017 72.178,41.995 72.548,41.625 D2.1@73.476,41.625 ; U2.B9@71.195,49.029 U2.A4@71.195,49.329 72.171,49.329 72.39,49.547 72.39,50.546 v1(72.931,51.087) 73.472,51.628 D1.2@73.472,52.338 ; R9.1@113.653,54.483 113.676,54.483 114.121,54.928 v1(114.121,56.018) C13.2@114.121,57.107
  Layer 1 w0.508: v1(72.363,41.81) 72.363,50.519 v1(72.931,51.087) 75.115,51.087 77.065,53.037 105.31,53.037 108.291,56.018 v1(114.121,56.018)
X_D_N: U5.3 X1.30 | length 44
  Top Layer w0.139: X1.30@74.599,67.334 74.599,68.389 74.68,68.47 75.914,68.47 79.938,64.446 81.071,64.446 81.153,64.365 v2(81.153,64.008) ; v2(89.057,47.612) 89.478,47.289 89.609,47.206 89.724,47.206 96.994,47.206 98.351,48.562 98.816,48.562 99.003,48.75 99.603,48.75 U5.3@99.649,48.796
  Bottom Layer w0.139: v2(81.153,64.008) 81.153,64.365 81.071,64.446 80.715,64.446 80.422,64.739 80.306,64.739 80.225,64.658 80.225,55.247 87.914,47.557 88.463,47.557 88.485,47.535 88.82,47.535 88.838,47.553 88.997,47.553 v2(89.057,47.612)
X_D_P: U5.4 X1.31 | length 44.9
  Top Layer w0.139: X1.31@74.599,69.874 74.599,68.818 74.68,68.737 76.024,68.737 80.048,64.713 81.071,64.713 81.153,64.794 v2(81.153,65.151) ; v2(88.494,46.939) 97.104,46.939 98.461,48.296 98.898,48.296 U5.4@99.649,48.296
  Bottom Layer w0.139: v2(81.153,65.151) 81.153,64.794 81.071,64.713 80.825,64.713 80.532,65.006 80.196,65.006 79.958,64.768 79.958,55.137 87.804,47.291 88.347,47.291 88.434,47.204 88.434,46.999 v2(88.494,46.939)
pads on no net: J1.S1 J1.S2 J2.S1 J2.S2 J4.S1 J4.S2 J5.S1 J5.S2 J6.S1 J6.S2 J7.S1 J7.S2 K1.1 K1.6 U1.16 U1.29 U1.36 U1.37 U2. U2.A8 U2.B8 U3.13 U3.14 U3.17 U3.18 U4.13 U4.14 U4.17 U4.18 U5.12 U5.13 U5.16 U5.17 U5.18 U5.19 U5.20 U5.21 VR1.4 X1.1 X1.2 X1.5 X1.6 X1.7 X1.8 X1.9 X1.10 X1.11 X1.12 X1.15 X1.16 X1.17 X1.18 X1.19 X1.20 X1.21 X1.22 X1.23 X1.24 X1.25 X1.26 X1.28 X1.29 X1.32 X1.33
copper on no net: | length 0.2
  Top Layer w0.156: 96.544,83.653 96.647,83.55 ; 97.79,83.629 97.814,83.653

## Polygon pours and split planes (outlines as drawn)
GND on Bottom Layer "GND_BOTTOM" (solid, remove dead copper, pour order 13): 63.834,29.948 63.834,80.518 cw(c68.834,80.518) 68.834,85.518 158.242,85.518 cw(c158.242,80.518) 163.242,80.518 163.282,80.403 163.242,29.948 cw(c158.242,29.948) 158.242,24.948 68.834,24.948 cw(c68.834,29.948)
5V on Bottom Layer "5V_L04_P001" (solid, pour order 1): 125.176,33.477 117.526,33.477 115.875,35.128 115.875,43.967 119.712,43.967 119.964,44.219 119.964,47.447 123.19,47.447 123.19,37.897 123.749,37.897 125.095,36.551
19V on Bottom Layer "19V_L04_P000" (solid, pour order 0): 98.527,30.836 98.679,30.683 98.679,27.559 99.568,26.67 143.701,26.67 145.034,27.559 145.034,30.988 135.128,30.988 135.128,32.385 137.668,32.385 138.176,32.893 138.176,34.036 146.05,34.036 146.812,33.274 146.812,26.289 145.821,25.298 96.882,25.298 96.012,26.458 96.012,30.683 96.164,30.836
3V3 on Bottom Layer "3V3_L04_P003" (solid, pour order 3): 137.806,43.028 145.771,43.028 145.948,43.205 145.948,45.085 137.806,45.085
GND on Layer 2 "GND_LAYER_2" (solid, remove dead copper, pour order 11): 63.834,29.948 63.834,80.518 cw(c68.834,80.518) 68.834,85.518 158.242,85.518 cw(c158.242,80.518) 163.242,80.518 163.282,80.403 163.242,29.948 cw(c158.242,29.948) 158.242,24.948 68.834,24.948 cw(c68.834,29.948)
3V3 on Layer 2 "3V3_L03_P004" (solid, pour order 4): 93.243,52.375 90.424,52.375 90.424,49.301 93.243,49.301
GND on Top Layer "GND_TOP" (solid, remove dead copper, pour order 10): 63.834,29.948 63.834,80.518 cw(c68.834,80.518) 68.834,85.518 158.242,85.518 cw(c158.242,80.518) 163.242,80.518 163.282,80.403 163.242,29.948 cw(c158.242,29.948) 158.242,24.948 68.834,24.948 cw(c68.834,29.948)
3V3 on Top Layer "3V3_L01_P005" (solid, pour order 5): 90.373,49.505 90.373,49.301 92.888,49.301 93.218,49.632 97.409,49.632 98.196,50.419 100.635,50.419 100.635,51.46 98.095,51.46 97.511,52.045 97.511,53.619 90.78,53.619 90.373,53.315
GND on Layer 1 "GND_LAYER_1" (solid, remove dead copper, pour order 12): 63.834,29.948 63.834,80.518 cw(c68.834,80.518) 68.834,85.518 158.242,85.518 cw(c158.242,80.518) 163.242,80.518 163.282,80.403 163.242,29.948 cw(c158.242,29.948) 158.242,24.948 68.834,24.948 cw(c68.834,29.948)

## Other copper
Top Layer:
  rectangle net 3V3: 94.971,50.343 96.241,50.851
  rectangle net 3V3: 96.977,50.216 99.822,51.156
  rectangle net 3V3: 99.619,50.216 100.584,51.46
  rectangle net 3V3: 95.047,52.476 96.342,53.035
  rectangle net 3V3: 92.939,52.476 94.285,53.01
Bottom Layer:
  region net 19V: 138.564,33.047 138.39,33.22 137.429,32.259 137.602,32.085
  rectangle net 19V: 135.382,30.988 137.922,32.258

## Silkscreen, mask and mechanical layers (free items; w line width, h text height)
Top Overlay:
  text "BLE LED" at 127.737,78.765 h1.27
  text "Device Switch" at 119.405,77.611 h1.27
  text "Extra" at 143.307,77.178 h1.27
  text "Pre Sensor" at 119.431,32.018 h1.27
  text "Solinoid" at 126.594,32.018 h1.27
  text "Pump" at 132.537,32.032 h1.27
  text "Lift Stepper" at 140.665,27.657 h1.27
Board Shape:
  lines w1: 158.115,85.518 68.834,85.518 ccw(c68.834,80.518) 63.834,80.518 63.834,29.948 ccw(c68.834,29.948) 68.834,24.948 158.242,24.948 ccw(c158.242,29.948) 163.242,29.948 163.282,80.403 ; 158.242,85.518 cw(c158.242,80.518) 163.242,80.518